# EAGLE board nRF9160 Thing Plus-Panel (EAGLE 9.6.2), part 1 of 7
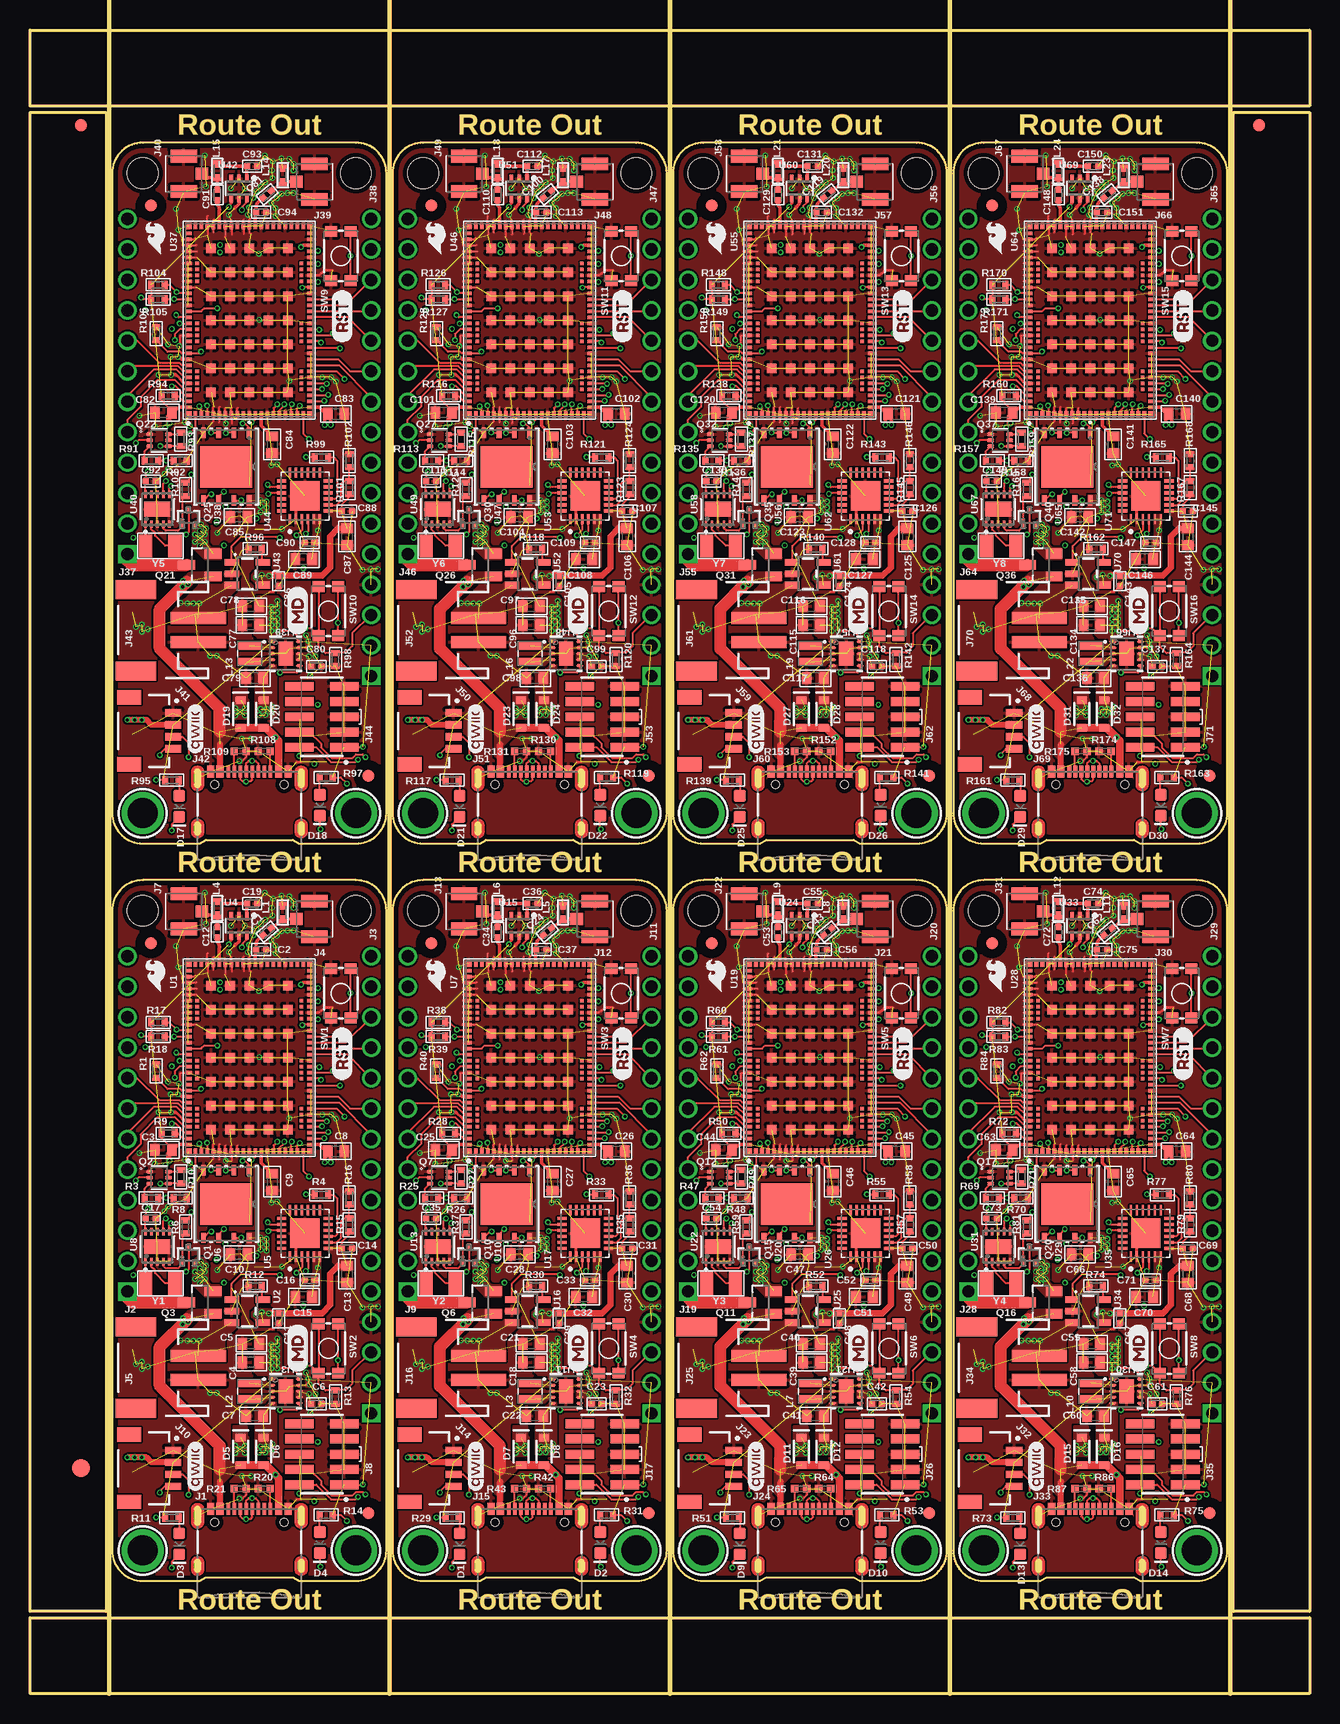
[diagram p0: board, top side]
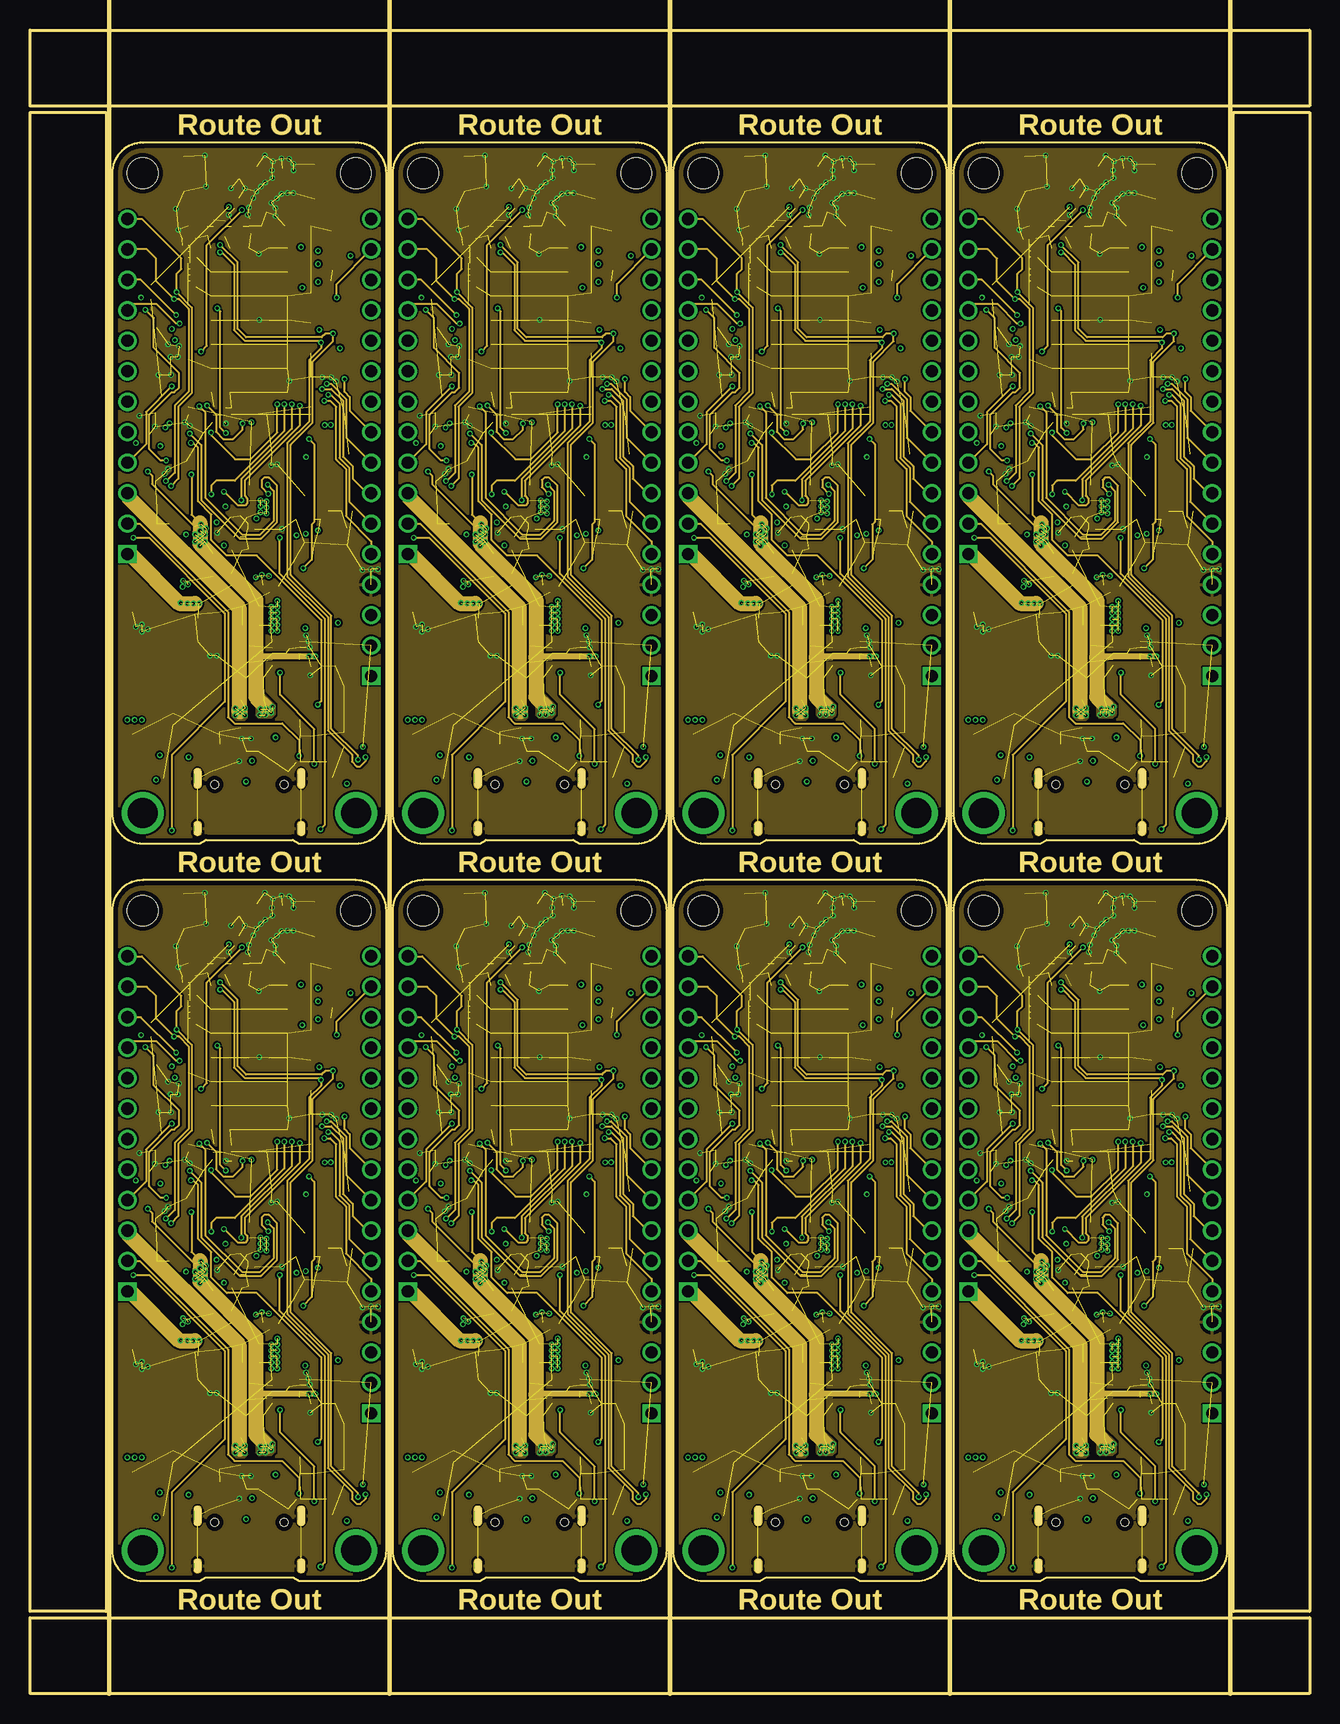
[diagram p1: board, inner layer Route2]
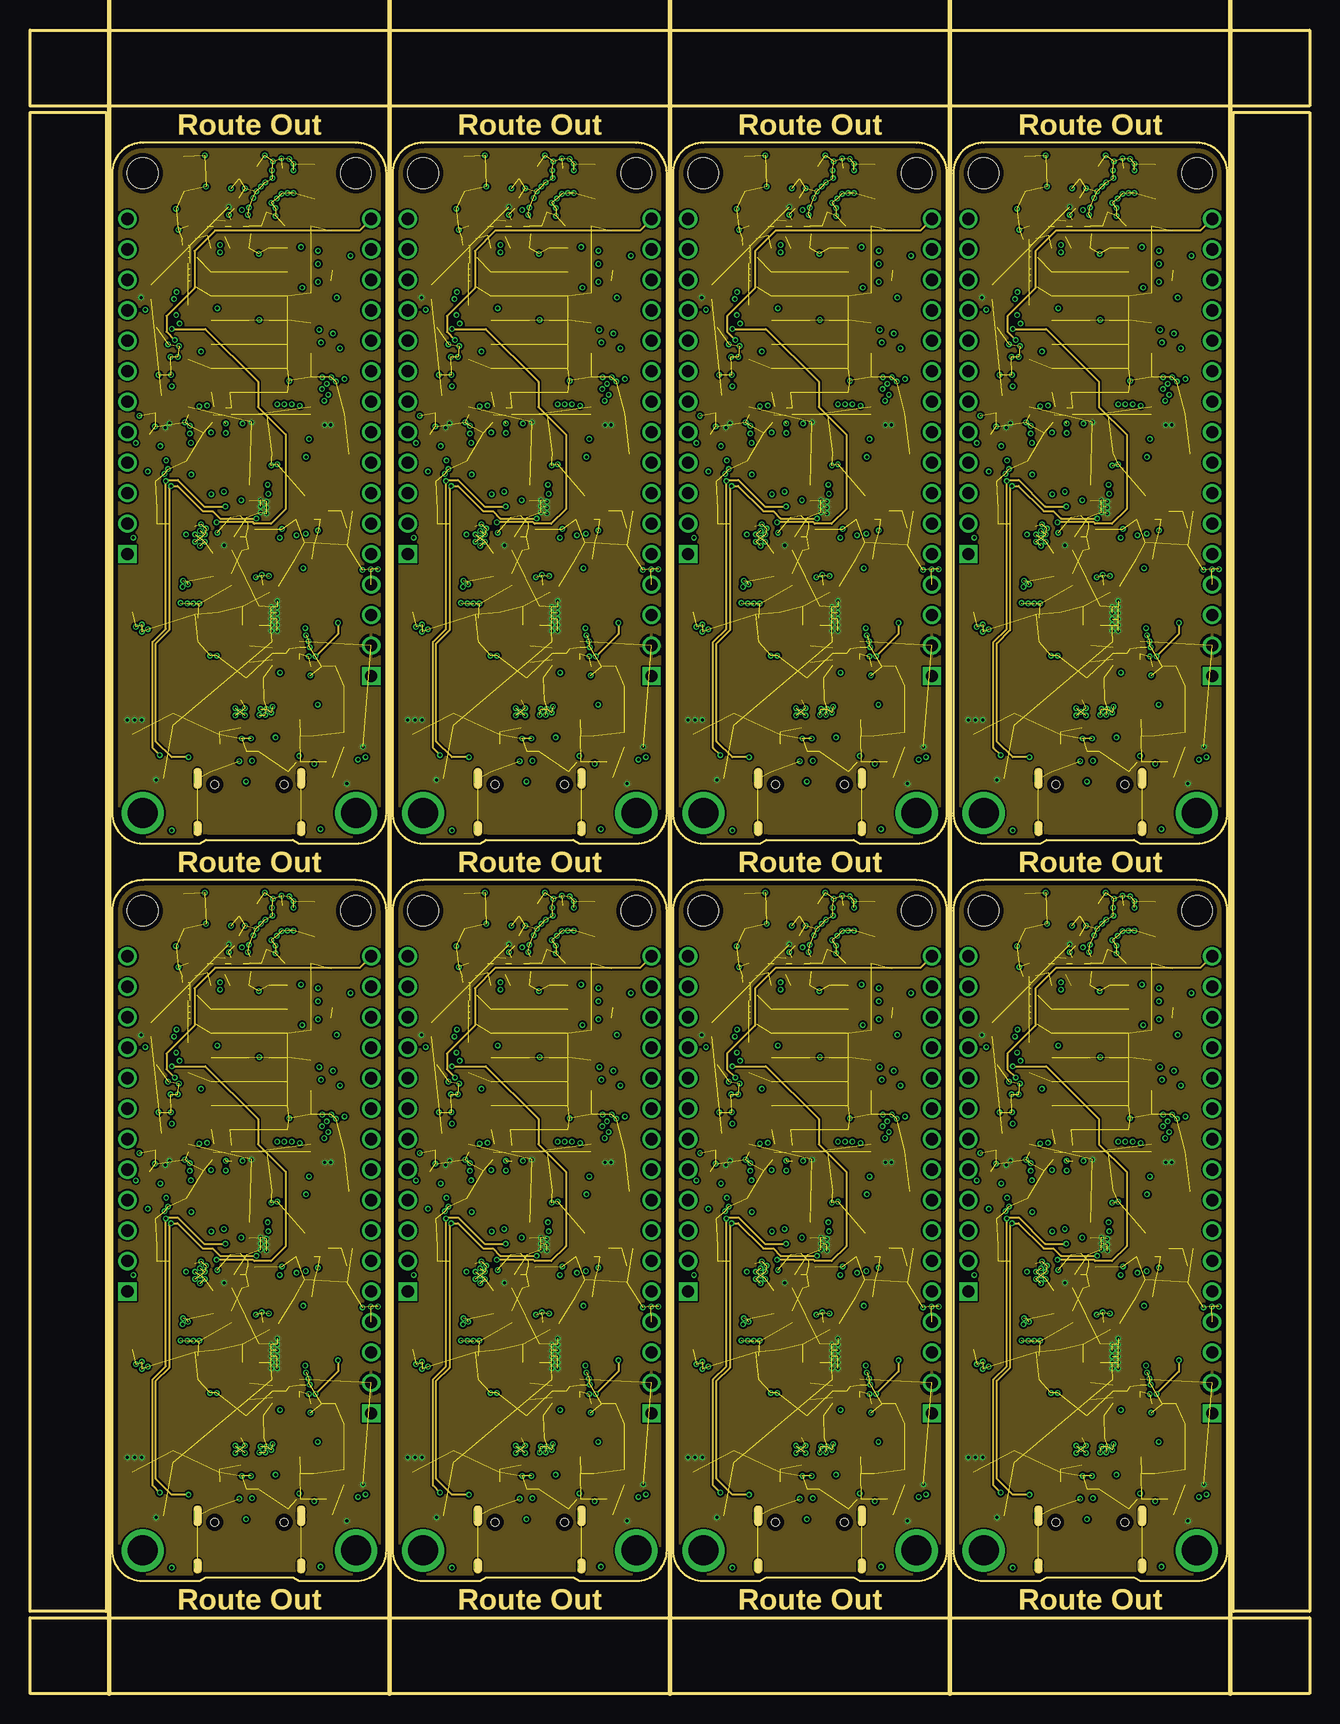
[diagram p2: board, inner layer Route15]
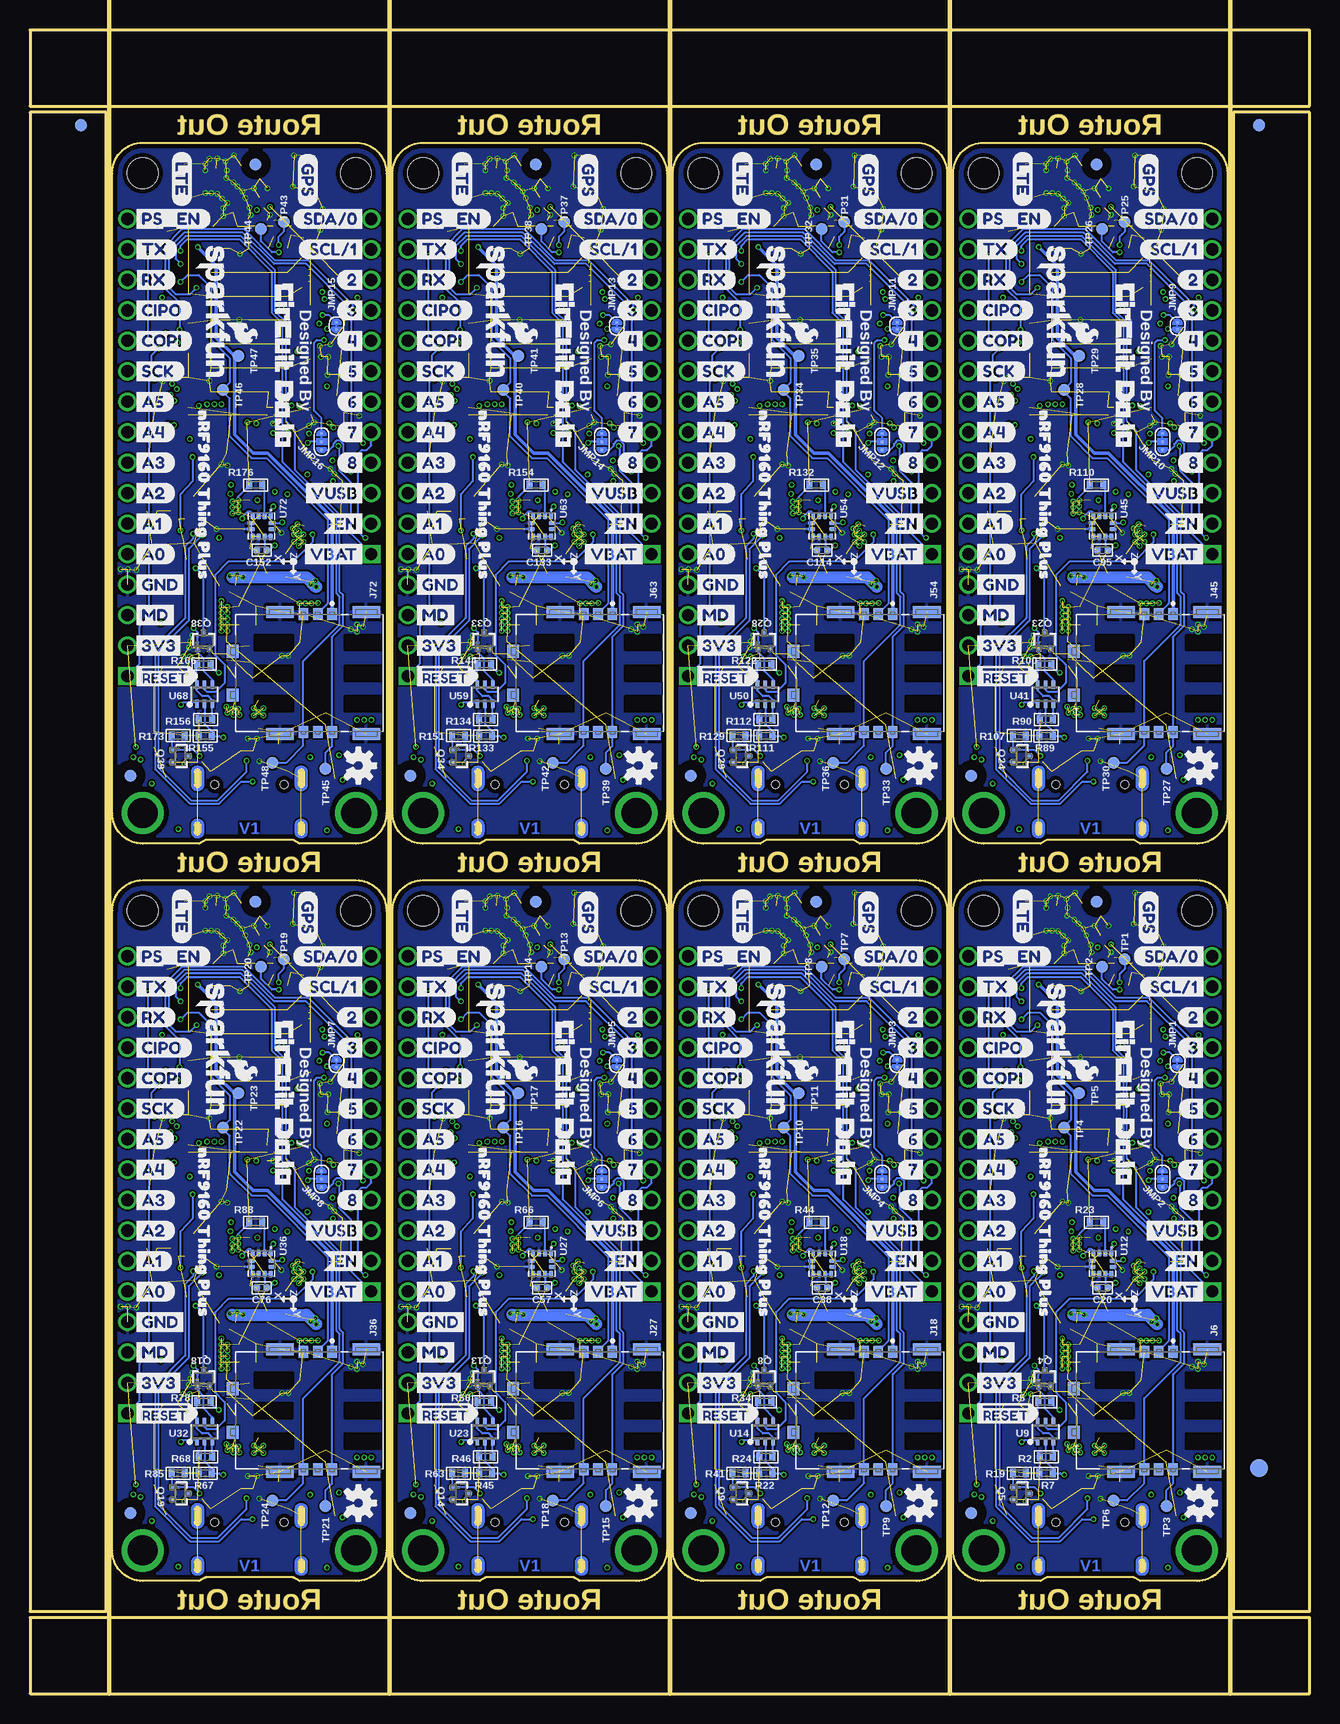
[diagram p3: board, bottom side, seen from below]

Size 106.68 x 138.68 mm. Coordinates in mm from the lower left corner, seen from the top.
Outline: 29.72,11.94 29.72,65.28 arc90 27.18,67.82 9.4,67.82 arc90 6.86,65.28 6.86,11.94 arc90 9.4,9.4 14.14,9.4 14.65,9.7 21.93,9.7 22.44,9.4 27.18,9.4 arc90 29.72,11.94
Outline: 53.09,11.94 53.09,65.28 arc90 50.55,67.82 32.77,67.82 arc90 30.23,65.28 30.23,11.94 arc90 32.77,9.4 37.51,9.4 38.01,9.7 45.3,9.7 45.81,9.4 50.55,9.4 arc90 53.09,11.94
Outline: 76.45,11.94 76.45,65.28 arc90 73.91,67.82 56.13,67.82 arc90 53.59,65.28 53.59,11.94 arc90 56.13,9.4 60.87,9.4 61.38,9.7 68.67,9.7 69.17,9.4 73.91,9.4 arc90 76.45,11.94
Outline: 99.82,11.94 99.82,65.28 arc90 97.28,67.82 79.5,67.82 arc90 76.96,65.28 76.96,11.94 arc90 79.5,9.4 84.24,9.4 84.75,9.7 92.03,9.7 92.54,9.4 97.28,9.4 arc90 99.82,11.94
Outline: 29.72,73.41 29.72,126.75 arc90 27.18,129.29 9.4,129.29 arc90 6.86,126.75 6.86,73.41 arc90 9.4,70.87 14.14,70.87 14.65,71.17 21.93,71.17 22.44,70.87 27.18,70.87 arc90 29.72,73.41
Outline: 53.09,73.41 53.09,126.75 arc90 50.55,129.29 32.77,129.29 arc90 30.23,126.75 30.23,73.41 arc90 32.77,70.87 37.51,70.87 38.01,71.17 45.3,71.17 45.81,70.87 50.55,70.87 arc90 53.09,73.41
Outline: 76.45,73.41 76.45,126.75 arc90 73.91,129.29 56.13,129.29 arc90 53.59,126.75 53.59,73.41 arc90 56.13,70.87 60.87,70.87 61.38,71.17 68.67,71.17 69.17,70.87 73.91,70.87 arc90 76.45,73.41
Outline: 99.82,73.41 99.82,126.75 arc90 97.28,129.29 79.5,129.29 arc90 76.96,126.75 76.96,73.41 arc90 79.5,70.87 84.24,70.87 84.75,71.17 92.03,71.17 92.54,70.87 97.28,70.87 arc90 99.82,73.41
Outline: 0,6.35 106.68,6.35 106.68,0 0,0 0,6.35
Outline: 100.33,131.83 106.68,131.83 106.68,6.86 100.33,6.86 100.33,131.83
Outline: 0,138.68 106.68,138.68 106.68,132.33 0,132.33 0,138.68
Outline: 0,131.83 6.35,131.83 6.35,6.86 0,6.86 0,131.83
Copper layers (1*2*15*16): Top 0.035559375mm / dielectric 0.17018125mm / Route2 0.01778125mm / dielectric 47mil / Route15 0.01778125mm / dielectric 0.17018125mm / Bottom 0.035559375mm
Design rules "nRF9160 Thing Plus": minimum track width 5mil, minimum drill 10mil, track to track 5mil, track to pad 5mil, pad to pad 5mil, via to via 5mil, smd to smd 5mil, copper to edge 15mil, drill to drill 6mil, minimum pad ring 4mil, minimum via ring 4mil, stop-mask expansion 2mil, vias tented up to drill 0.3mm, thermal gap 10mil
Net classes: 1 usb: width 0.15 mm; 2 rf: width 0.3 mm
Holes 2.54 mm at 9.4,65.28 27.18,65.28 32.77,65.28 50.55,65.28 56.13,65.28 73.91,65.28 79.5,65.28 97.28,65.28 9.4,126.75 27.18,126.75 32.77,126.75 50.55,126.75 56.13,126.75 73.91,126.75 79.5,126.75 97.28,126.75
tRestrict: area 24.2,38 to 24.4,38.8; area 22.5,36.9 to 23.3,37.1; area 47.6,38 to 47.8,38.8; area 45.9,36.9 to 46.7,37.1; area 71,38 to 71.2,38.8; area 69.3,36.9 to 70.1,37.1; area 94.3,38 to 94.5,38.8; area 92.6,36.9 to 93.4,37.1; area 24.2,99.5 to 24.4,100.3; area 22.5,98.4 to 23.3,98.6; area 47.6,99.5 to 47.8,100.3; area 45.9,98.4 to 46.7,98.6; area 71,99.5 to 71.2,100.3; area 69.3,98.4 to 70.1,98.6; area 94.3,99.5 to 94.5,100.3; area 92.6,98.4 to 93.4,98.6
Milling: 5 lines

## Footprints (pad centres in the part's own frame; a part is rotated, then mirrored left to right if it is on the bottom)
CAPC1005X55N = smd 0.54 x 0.6: 1 -0.43,0; 2 0.43,0
C0603 = smd 0.8 x 1: 1 -0.7,0; 2 0.7,0
LED-0603 = smd 1 x 1: A -0.877,0; C 0.877,0
SOD-323 = smd 0.63 x 0.83: A 1.15,0; C -1.15,0
FIDUCIAL-1X2 = smd 1 x 1: 1 0,0
FIDUCIAL-1.5X3 = smd 1.5 x 1.5: 1 0,0
USB-C-16P_4LAYER-PADS = smd 0.3 x 1: A5 -1.25,-0.34; A6 -0.25,-0.34; A7 0.25,-0.34; A8 1.25,-0.34; B5 1.75,-0.34; B6 0.75,-0.34; B7 -0.75,-0.34; B8 -1.75,-0.34 | smd 0.6 x 1: GND -3.225,-0.34; GND2 3.225,-0.34; VBUS1 -2.45,-0.34; VBUS2 2.45,-0.34 | drill 0.4 pad 0.6 long: SHLD1 -4.318,-0.915; SHLD2 4.318,-0.915; SHLD3 -4.318,-5.095; SHLD4 4.318,-5.095 | hole 0.65: -2.89,-1.445; 2.89,-1.445
CON-HEADER-1X12-MALE-PIN = drill 1.016 square: 1 0,0 | drill 1.016: 2 2.54,0; 3 5.08,0; 4 7.62,0; 5 10.16,0; 6 12.7,0; 7 15.24,0; 8 17.78,0; 9 20.32,0; 10 22.86,0; 11 25.4,0; 12 27.94,0
CON-HEADER-1X16-MALE-PIN = drill 1.016 square: 1 0,0 | drill 1.016: 2 2.54,0; 3 5.08,0; 4 7.62,0; 5 10.16,0; 6 12.7,0; 7 15.24,0; 8 17.78,0; 9 20.32,0; 10 22.86,0; 11 25.4,0; 12 27.94,0; 13 30.48,0; 14 33.02,0; 15 35.56,0; 16 38.1,0
TE_1909763-1 = smd 1 x 1.05: 1 0,-1.525 | smd 1.05 x 2.2: 2 -1.475,0; 3 1.475,0
JST-2-SMD = smd 1 x 4.6: 1 -1,-3.7; 2 1,-3.7 | smd 1.6 x 3.4: NC1 -3.4,1.5; NC2 3.4,1.5
MOLEX_104224-0820 = smd 1 x 2.3: G1 -5.1,1.5; G2 -5.1,8.7; G3 5.1,8.7; G4 5.1,1.5 | smd 1.1 x 1: R1 -1.82,12.625; R2 1.82,12.625 | smd 1 x 0.8: S1 4.9,4.35; S2 4.9,5.55; S3 -4.9,4.35; S4 4.9,6.75; S5 -4.9,5.55; S6 -4.9,6.75
SAMTEC_FTSH-105-XX-X-DV = smd 0.74 x 2.38: 1 -2.54,-1.88; 2 -2.54,1.88; 3 -1.27,-1.88; 4 -1.27,1.88; 5 0,-1.88; 6 0,1.88; 7 1.27,-1.88; 8 1.27,1.88; 9 2.54,-1.88; 10 2.54,1.88
JST04_1MM_RA = smd 0.6 x 1.35: 1 -1.5,0; 2 -0.5,0; 3 0.5,0; 4 1.5,0 | smd 1.2 x 2: NC1 2.8,-3.675; NC2 -2.8,-3.675
JUMPER-ROUND-NC = smd 0.2 x 0.2: P$1 -0.3,0; P$2 0.3,0
JUMPER-ROUND-3-NO-R = smd 0.2 x 0.2: P$1 -0.675,0; P$2 0,0; P$3 0.675,0
IND0402_22N_TAI = smd 0.61 x 0.711: 1 -0.572,0; 2 0.572,0
IND-2P0X2P0X1P2 = smd 0.65 x 2: P$1 -0.675,0; P$2 0.675,0
DIO_RB558WMF-L = smd 0.254 x 0.483: 1 -0.5,-0.711; 2 0.5,-0.711; 3 0,0.711
SOT50P160X60-6N = smd 0.56 x 0.32: 1 -0.785,0.5; 2 -0.785,0; 3 -0.785,-0.5; 4 0.785,-0.5; 5 0.785,0; 6 0.785,0.5
SOT23 = smd 0.8 x 1.4: 1 -0.95,-1.1; 2 0.95,-1.1; 3 0,1.1
R0402-M = smd 0.5 x 0.7: 1 -0.55,0; 2 0.55,0
0402-TIGHT = smd 0.6 x 0.6: 1 -0.5,0; 2 0.5,0
TACTILE_SWITCH_SMD_4.6X2.8MM = smd 0.9 x 1: 1 -2.05,-0.8; 2 2.05,-0.8; 3 2.05,0.8; 4 -2.05,0.8
TP-1P0 = smd 1 x 1: TP 0,0
NORDIC_NRF9160-SICA-R = smd 0.54 x 0.54: 1 -7.845,5.095; 21 -7.845,-5.095; 52 7.845,-5.095; 72 7.845,5.095 | smd 0.54 x 0.3: 2 -7.845,4.5; 3 -7.845,4; 4 -7.845,3.5; 5 -7.845,3; 6 -7.845,2.5; 7 -7.845,2; 8 -7.845,1.5; 9 -7.845,1; 10 -7.845,0.5; 11 -7.845,0; 12 -7.845,-0.5; 13 -7.845,-1; 14 -7.845,-1.5; 15 -7.845,-2; 16 -7.845,-2.5; 17 -7.845,-3; 18 -7.845,-3.5; 19 -7.845,-4; 20 -7.845,-4.5; 53 7.845,-4.5; 54 7.845,-4; 55 7.845,-3.5; 56 7.845,-3; 57 7.845,-2.5; 58 7.845,-2; 59 7.845,-1.5; 60 7.845,-1; 61 7.845,-0.5; 62 7.845,0; 63 7.845,0.5; 64 7.845,1; 65 7.845,1.5; 66 7.845,2; 67 7.845,2.5; 68 7.845,3; 69 7.845,3.5; 70 7.845,4; 71 7.845,4.5 | smd 0.3 x 0.54: 22 -7.25,-5.095; 23 -6.75,-5.095; 24 -6.25,-5.095; 25 -5.75,-5.095; 26 -5.25,-5.095; 27 -4.75,-5.095; 28 -4.25,-5.095; 29 -3.75,-5.095; 30 -3.25,-5.095; 31 -2.75,-5.095; 32 -2.25,-5.095; 33 -1.75,-5.095; 34 -1.25,-5.095; 35 -0.75,-5.095; 36 -0.25,-5.095; 37 0.25,-5.095; 38 0.75,-5.095; 39 1.25,-5.095; 40 1.75,-5.095; 41 2.25,-5.095; 42 2.75,-5.095; 43 3.25,-5.095; 44 3.75,-5.095; 45 4.25,-5.095; 46 4.75,-5.095; 47 5.25,-5.095; 48 5.75,-5.095; 49 6.25,-5.095; 50 6.75,-5.095; 51 7.25,-5.095; 73 7.25,5.095; 74 6.75,5.095; 75 6.25,5.095; 76 5.75,5.095; 77 5.25,5.095; 78 4.75,5.095; 79 4.25,5.095; 80 3.75,5.095; 81 3.25,5.095; 82 2.75,5.095; 83 2.25,5.095; 84 1.75,5.095; 85 1.25,5.095; 86 0.75,5.095; 87 0.25,5.095; 88 -0.25,5.095; 89 -0.75,5.095; 90 -1.25,5.095; 91 -1.75,5.095; 92 -2.25,5.095; 93 -2.75,5.095; 94 -3.25,5.095; 95 -3.75,5.095; 96 -4.25,5.095; 97 -4.75,5.095; 98 -5.25,5.095; 99 -5.75,5.095; 100 -6.25,5.095; 101 -6.75,5.095; 102 -7.25,5.095 | smd 0.8 x 0.8: 103_1 -6,3.2; 103_2 -4,3.2; 103_3 -2,3.2; 103_4 0,3.2; 103_5 2,3.2; 103_6 4,3.2; 103_7 6,3.2; 103_8 -6,1.6; 103_9 -4,1.6; 103_10 -2,1.6; 103_11 0,1.6; 103_12 2,1.6; 103_13 4,1.6; 103_14 6,1.6; 103_15 -6,0; 103_16 -4,0; 103_17 -2,0; 103_18 0,0; 103_19 2,0; 103_20 4,0; 103_21 6,0; 103_22 -6,-1.6; 103_23 -4,-1.6; 103_24 -2,-1.6; 103_25 0,-1.6; 103_26 2,-1.6; 103_27 4,-1.6; 103_28 6,-1.6; 103_29 -6,-3.2; 103_30 -4,-3.2; 103_31 -2,-3.2; 103_32 0,-3.2; 103_33 2,-3.2; 103_34 4,-3.2; 103_35 6,-3.2 | smd 0.3 x 0.3: 104 -5.75,-4.35; 105 -5.25,-4.35; 106 -4.75,-4.35; 107 -4.25,-4.35; 108 -1.75,-4.35; 109 -1.25,-4.35; 110 -0.75,-4.35; 111 -0.25,-4.35; 112 3.25,-4.35; 113 3.75,-4.35; 114 4.25,-4.35; 115 4.75,-4.35; 116 4.75,4.35; 117 4.25,4.35; 118 3.75,4.35; 119 3.25,4.35; 120 -0.25,4.35; 121 -0.75,4.35; 122 -1.25,4.35; 123 -1.75,4.35; 124 -4.25,4.35; 125 -4.75,4.35; 126 -5.25,4.35; 127 -5.75,4.35
SOT23-5 = smd 0.55 x 1.2: 1 -0.95,-1.3; 2 0,-1.3; 3 0.95,-1.3; 4 0.95,1.3; 5 -0.95,1.3
DSK0010A = smd 0.6 x 0.25: 1 -1.15,1; 2 -1.15,0.5; 3 -1.15,0; 4 -1.15,-0.5; 5 -1.15,-1; 6 1.15,-1; 7 1.15,-0.5; 8 1.15,0; 9 1.15,0.5; 10 1.15,1 | smd 1.2 x 2: 11 0,0
SOT363 = smd 0.3 x 0.7: 1 -0.65,-0.8; 2 0,-0.8; 3 0.65,-0.8; 4 0.65,0.8; 5 0,0.8; 6 -0.65,0.8
QFN50P400X400X80-25N = smd 0.84 x 0.26: 1 -1.935,1.25; 2 -1.935,0.75; 3 -1.935,0.25; 4 -1.935,-0.25; 5 -1.935,-0.75; 6 -1.935,-1.25; 13 1.935,-1.25; 14 1.935,-0.75; 15 1.935,-0.25; 16 1.935,0.25; 17 1.935,0.75; 18 1.935,1.25 | smd 0.26 x 0.84: 7 -1.25,-1.935; 8 -0.75,-1.935; 9 -0.25,-1.935; 10 0.25,-1.935; 11 0.75,-1.935; 12 1.25,-1.935; 19 1.25,1.935; 20 0.75,1.935; 21 0.25,1.935; 22 -0.25,1.935; 23 -0.75,1.935; 24 -1.25,1.935 | smd 2.45 x 2.45: 25 0,0
WIN_ZP-8-L = smd 0.86 x 0.403: 1 -2.818,1.905; 2 -2.818,0.635; 3 -2.818,-0.635; 4 -2.818,-1.905; 5 2.818,-1.905; 6 2.818,-0.635; 7 2.818,0.635; 8 2.818,1.905 | smd 3.454 x 4.343: 9 0,0
DFN10_2P7X2P7-L = smd 0.61 x 0.203: 1 -1.245,1; 2 -1.245,0.5; 3 -1.245,0; 4 -1.245,-0.5; 5 -1.245,-1; 6 1.245,-1; 7 1.245,-0.5; 8 1.245,0; 9 1.245,0.5; 10 1.245,1 | smd 1.245 x 2.159: 11 0,0
PQFN50P200X200100-12N = smd 0.575 x 0.35: 1 -0.875,0.75; 2 -0.875,0.25; 3 -0.875,-0.25; 4 -0.875,-0.75; 7 0.875,-0.75; 8 0.875,-0.25; 9 0.875,0.25; 10 0.875,0.75 | smd 0.35 x 0.575: 5 -0.25,-0.875; 6 0.25,-0.875; 11 0.25,0.875; 12 -0.25,0.875
FIDUCIAL-1MM = smd 1 x 1: 1 0,0
MOUNTING-HOLE-2.5MM-PLATED = drill 2.5 pad 3.2: P$1 0,0
XTAL320X150X90 = smd 1.092 x 1.905: 1 -1.219,0; 2 1.219,0